# Altium PCB RobotCtrl_Base_Power.PcbDoc
Units mil, origin at the board's own origin, x right, y up, seen from the top; angles counter-clockwise.
Board outline 3937.01 x 3937.01 mil, 2 copper layers (Top Layer, Bottom Layer); 21 components, 7 nets, 71 pads, 91 vias.
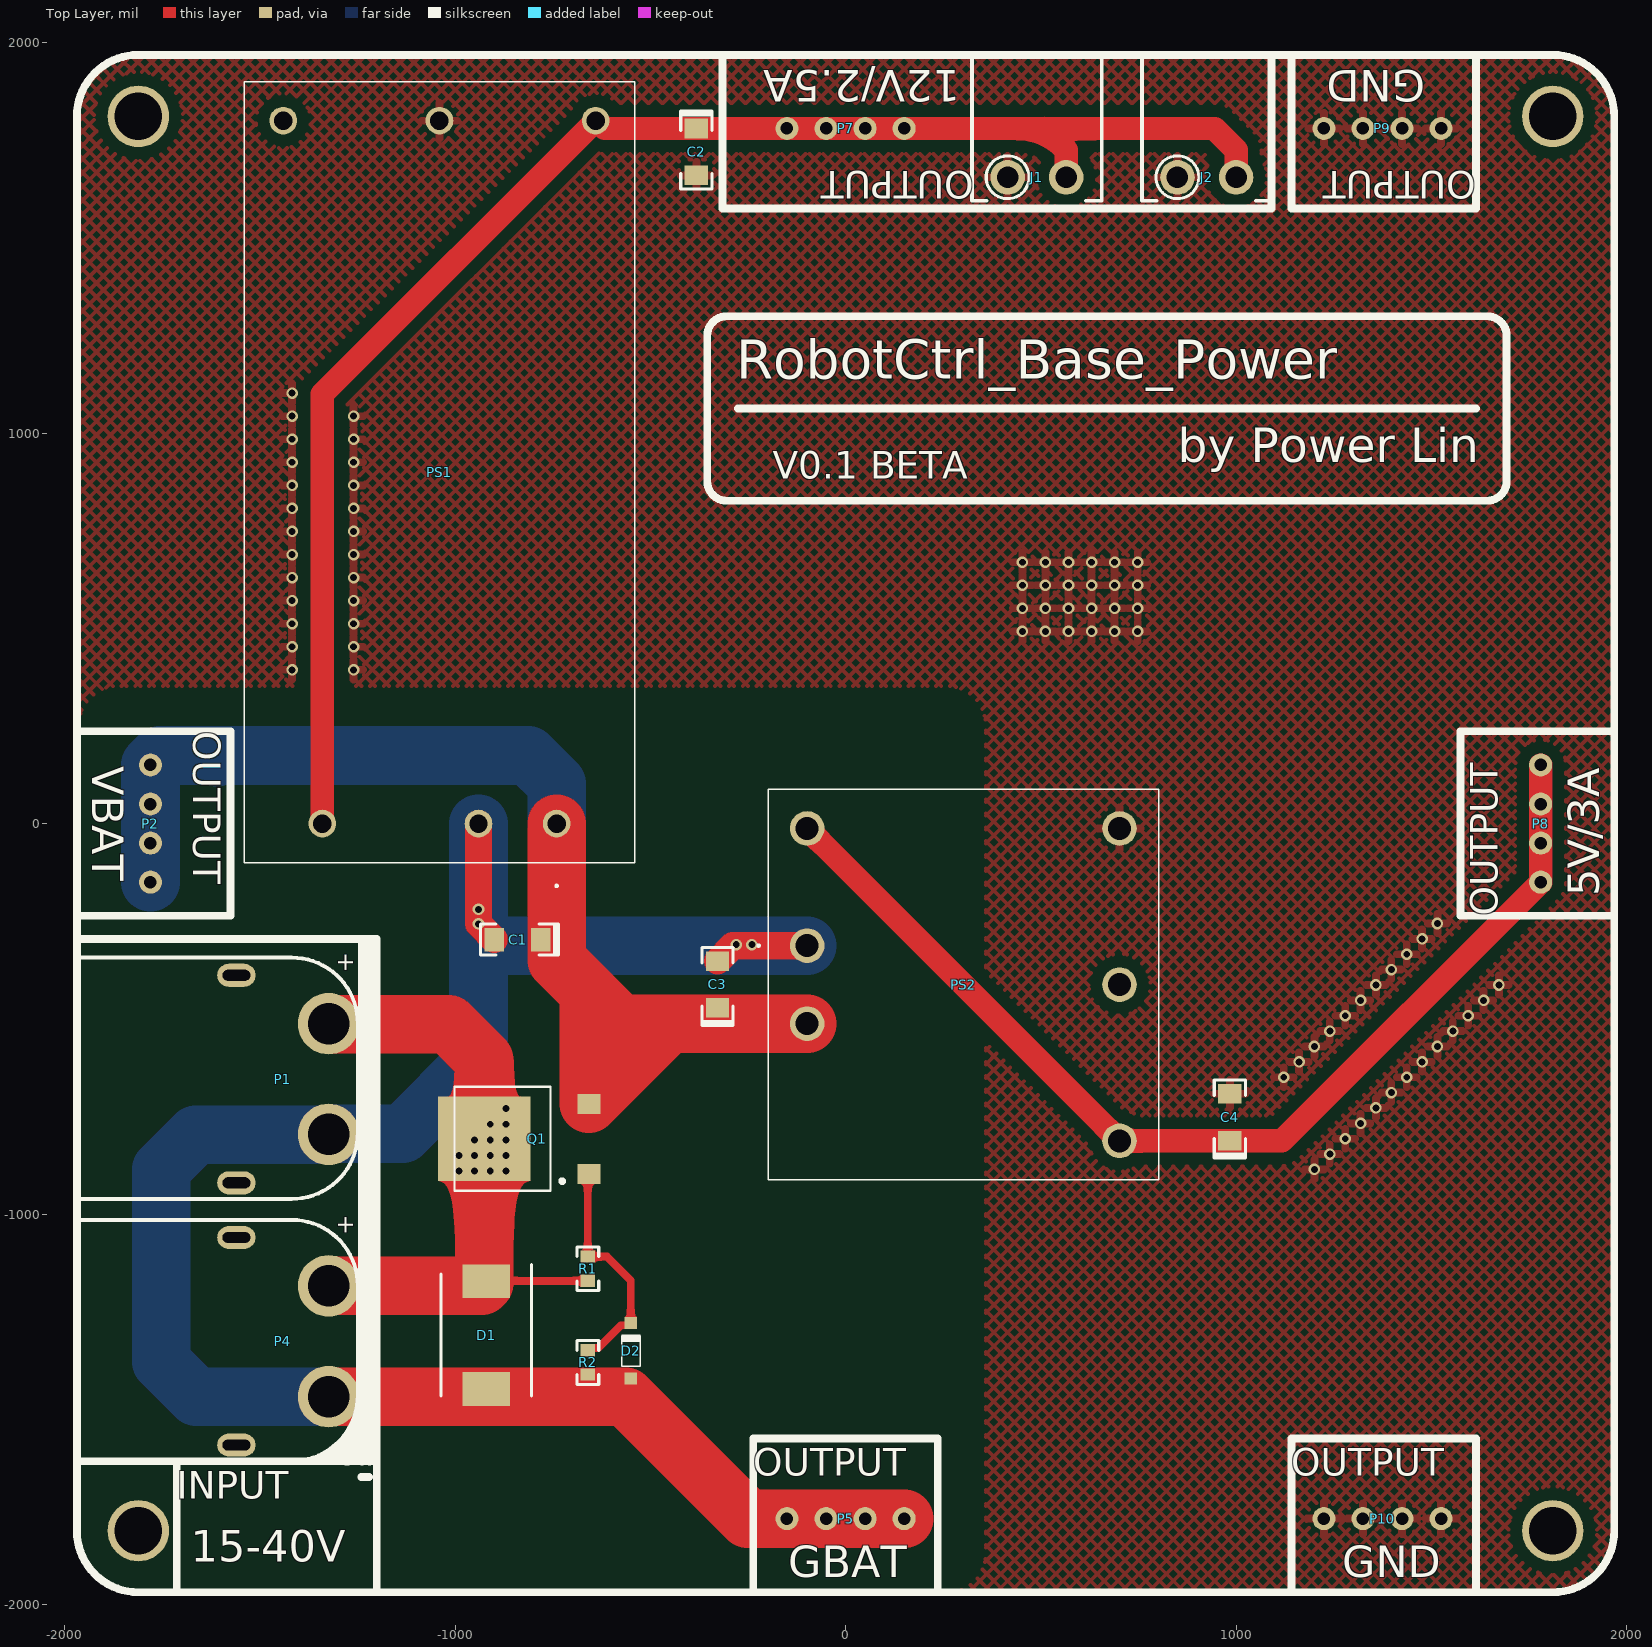
[diagram p0: Top Layer view]
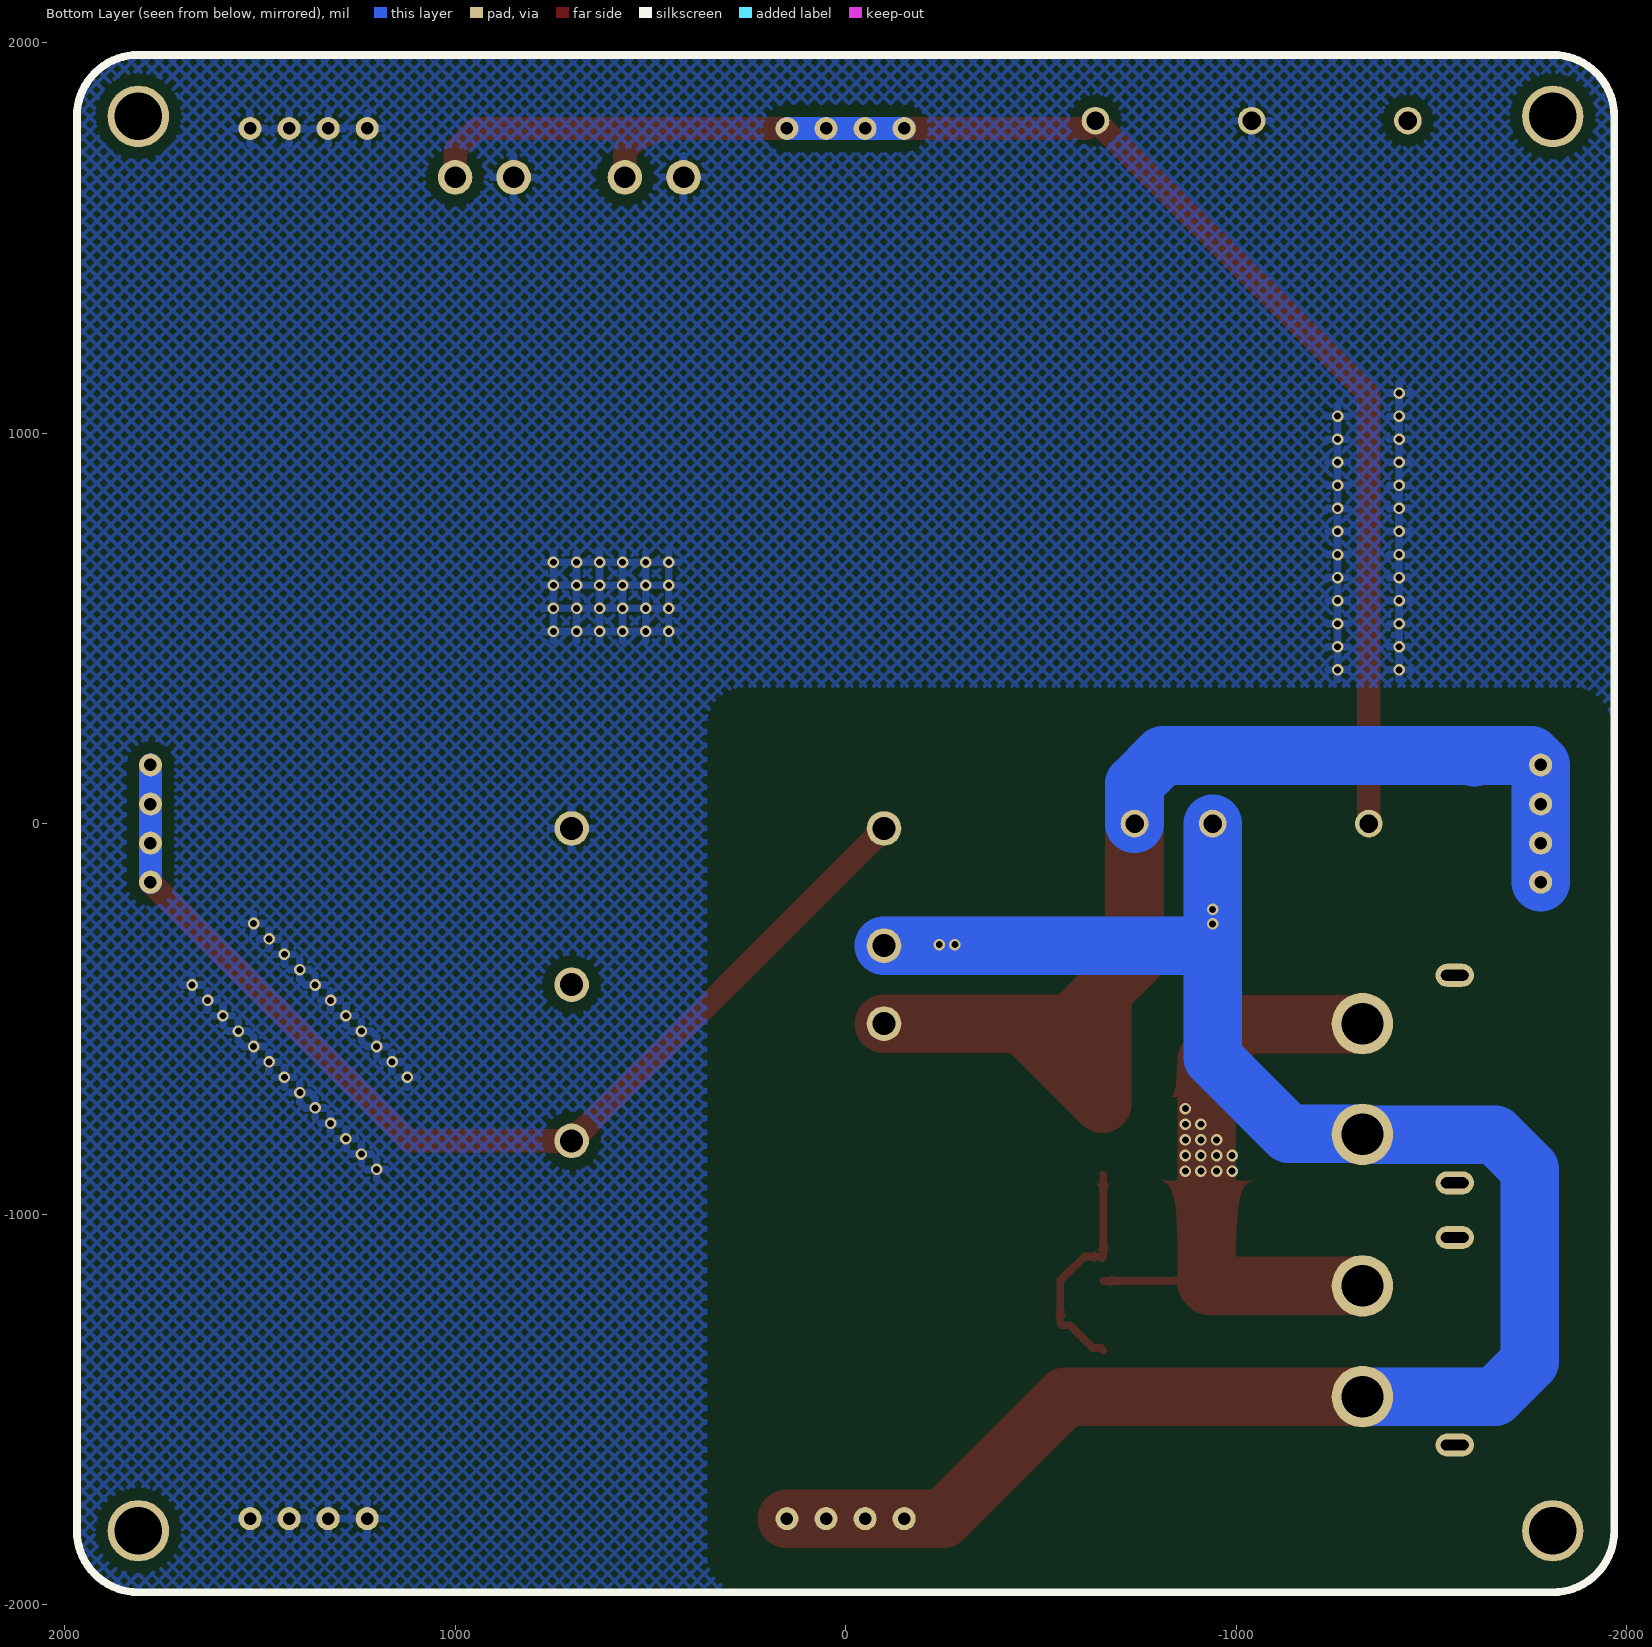
[diagram p1: Bottom Layer view, seen from below]
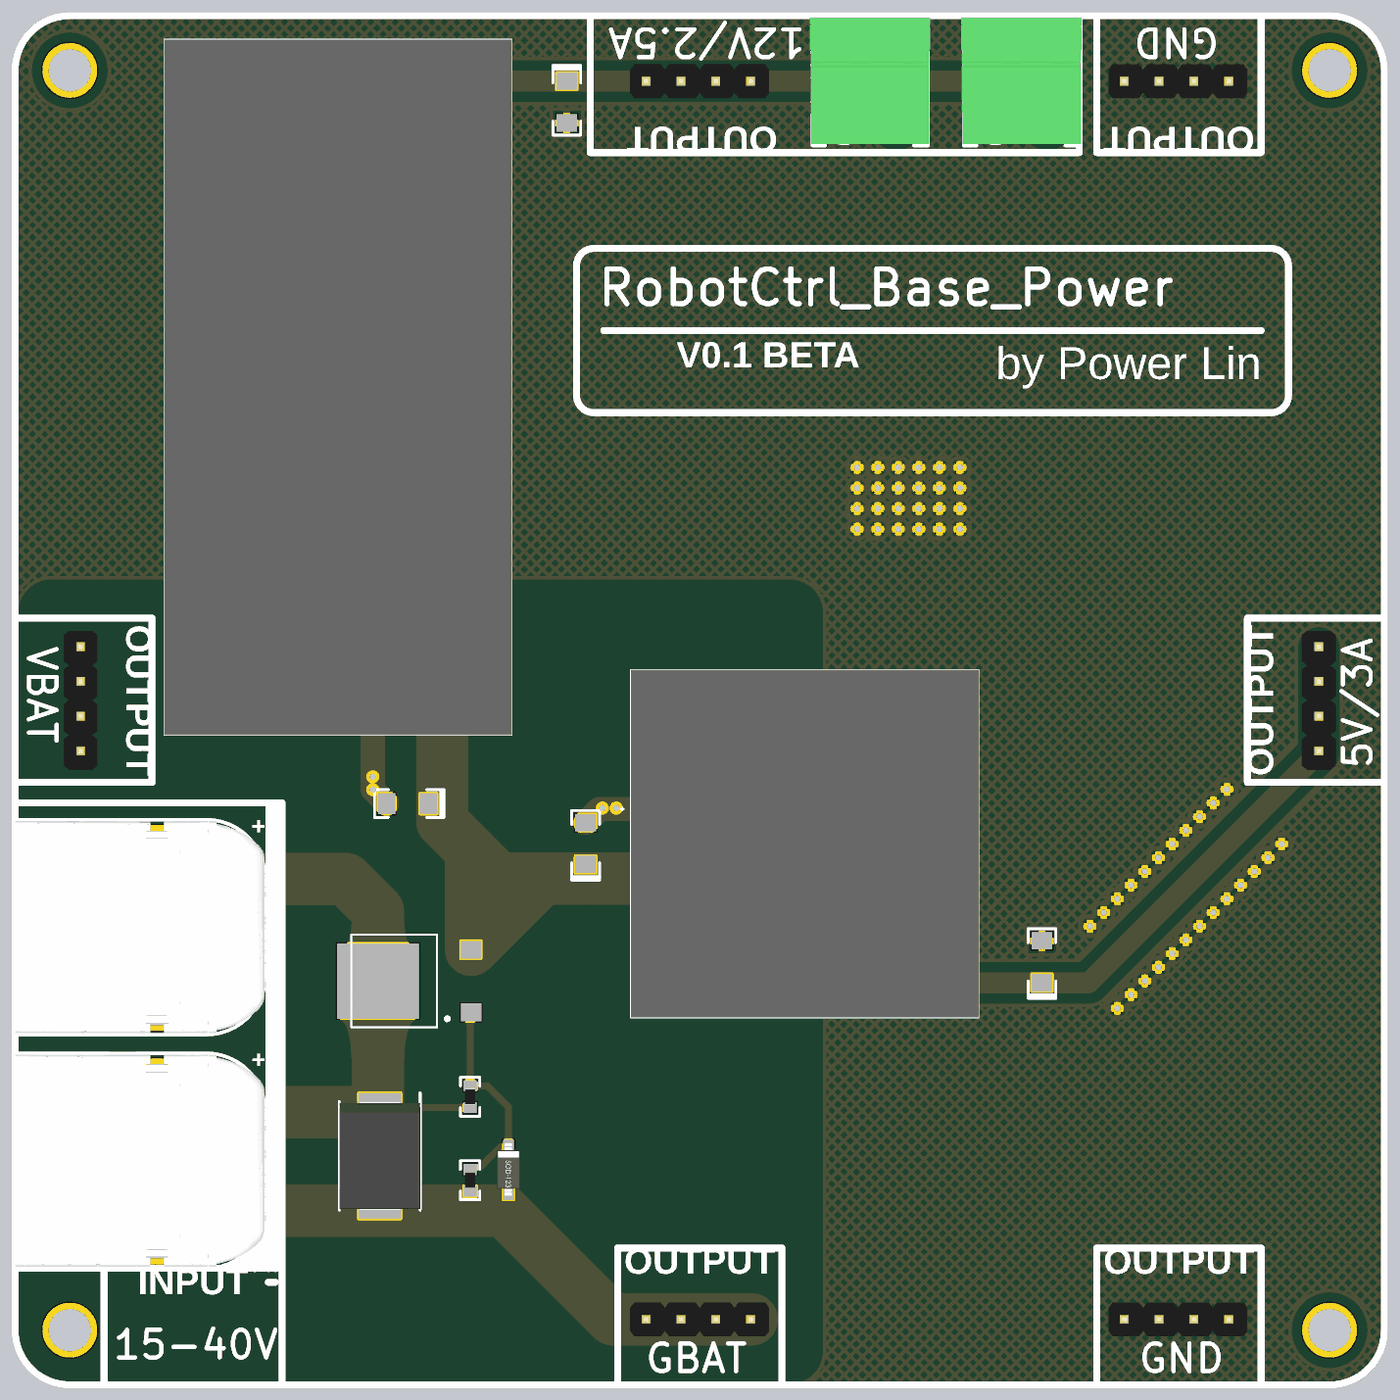
[diagram p2: 3D render of the assembled board from above, using the file's embedded part models]

## Layer stack, top to bottom
Top Solder: solder mask 0.4, Solder Resist, Dk 3.5
Top Layer: signal copper 1.4
Dielectric 1: dielectric 12.6, FR-4, Dk 4.8
Bottom Layer: signal copper 1.4
Bottom Solder: solder mask 0.4, Solder Resist, Dk 3.5

## Board outline
-1968.5,-1811.02 -1968.5,1811.02 cw(c-1811.02,1811.02) -1811.02,1968.5 1811.02,1968.5 cw(c1811.02,1811.02) 1968.5,1811.02 1968.5,-1811.02 cw(c1811.02,-1811.02) 1811.02,-1968.5 -1811.02,-1968.5 cw(c-1811.02,-1811.02)

## Design rules (kind name [scope] priority, off if disabled: settings)
Clearance [All] p1: gap=10 ignorepadtopadclearanceinfootprint=FALSE except(0: Arc-Hole Track-Hole SMDPad-Hole THPad-Hole Via-Hole Fill-Hole Poly-Hole Region-Hole Text-Hole; 30: Arc-Fill Arc-Poly Arc-Region Track-Fill Track-Poly Track-Region SMDPad-Fill SMDPad-Poly SMDPad-Region THPad-Fill THPad-Poly THPad-Region Via-Fill Via-Poly Via-Region Fill-Fill Fill-Poly Fill-Region Poly-Poly Poly-Region Region-Region)
PlaneConnect [All] p1: planeconnectstyle=Direct reliefexpansion=20 reliefentries=4 reliefconductorwidth=20 reliefairgap=10
PolygonConnect [All] p1: connectstyle=Relief reliefconductorwidth=20 reliefentries=4 polygonreliefangle="90 Angle" airgapwidth=10
RoutingVias [All] p1: holewidth=17.72 width=29.53 viastyle="Through Hole" minholewidth=17.72 minwidth=29.53 maxholewidth=17.72 maxwidth=29.53
SolderMaskExpansion [All] p1: expansion=4 istentingtop=FALSE
Width [All] p1: maxlimit=200 minlimit=10 preferedwidth=10
29 further rules are at their usual default settings.

## Components (designator, comment, footprint, x,y, rotation, side; value= is the part's Value field where it differs from the comment)
C1 "100nF" CAP-AUX-3216 -824,-289 r0 top
C2 "100nF" CAP-AUX-3216 -390,1736 r90 top
C3 "100nF" CAP-AUX-3216 -320,-428 r270 top
C4 "100nF" CAP-AUX-3216 992.13,-767.72 r270 top
D1 "TPSMCJ30CA" DO-214AB/SMC -920,-1310 r270 top
D2 "MMSZ5240B" SOD_123 -550,-1350 r270 top
J1 "KF2EDGR-3.81-2P" "FCI 06-381-2PIN" 490,1655 r0 top
J2 "KF2EDGR-3.81-2P" "FCI 06-381-2PIN" 925,1655 r0 top
P1 "XT60" XT60PW-M -1323.78,-795.98 r90 top
P2 "HDR1x4_2.54" HDR1x4_2.54_180 -1780,150 r0 top
P4 "XT60" XT60PW-M -1323.78,-1467.48 r90 top
P5 "HDR1x4_2.54" HDR1x4_2.54_180 -150,-1780 r90 top
P7 "HDR1x4_2.54" HDR1x4_2.54_180 -150,1780 r90 top
P8 "HDR1x4_2.54" HDR1x4_2.54_180 1780,150 r0 top
P9 "HDR1x4_2.54" HDR1x4_2.54_180 1225,1780 r90 top
P10 "HDR1x4_2.54" HDR1x4_2.54_180 1225,-1780 r90 top
PS1 "URB2412LD-30WR3" URB2412LD30WR3 -740,0 r90 top
PS2 "URB2405YMD-15WR3" URB2405YMD15WR3 -98.43,-312.52 r90 top
Q1 "NCE40P70K" TO-252 -657.48,-897.24 r180 top
R1 "10k" R-0603 -660,-1140 r90 top
R2 "20k" R-0603 -660,-1380 r270 top

## Footprints (in the part's own frame and the unit in brackets; to place one, negate y for a bottom-side part, rotate by r counter-clockwise, add the part's x,y. Pads: shape width x height; smd on the part's side, far side on the other; paste and mask are expansions set on the pad)
CAP-AUX-3216 [mil] "钽电容1206大小"
  rect 50x60 smd: 1(44,-8) 2(-76,-8)
  silkscreen extent -111,-48 89,32, body extent -82,-45 52,26, height 67
DO-214AB/SMC [mm]
  rect 2.2x3.1 smd: 1(3.5,0) 2(-3.5,0)
  silkscreen extent -4.6,-2.95 3.97,2.95, body extent -3.97,-2.95 3.97,2.95, height 2.5
"FCI 06-381-2PIN" [mm] "FCI Pluggable Terminal Block"
  round 2.25 hole 1.4: 1(-1.905,0) 2(1.905,0)
  silkscreen extent -4.22,-1.52 4.22,7.87, body extent -4.4,-1.4 4.4,7.8, height 7.6
HDR1x4_2.54_180 [mm]
  round 1.5 hole 0.813: 1(0,0) 2(0,-2.54) 3(0,-5.08) 4(0,-7.62)
  body extent -1.25,-8.89 1.25,1.27, height 8.2
R-0603 [mm]
  rect 0.8x0.96 smd: 1(-0.79,0) 2(0.79,0)
  silkscreen extent -1.42,-0.71 1.42,0.71, body extent -0.76,-0.38 0.76,0.38, height 0.41
SOD_123 [mm]
  rect 0.8x0.8 smd: 1(1.8,0) 2(-1.8,0)
  silkscreen extent -1.02,-0.6 1.02,0.6, body extent -1.95,-0.85 1.9,0.85, height 1.42
TO-252 [mm] "贴片MOS管"
  rect 1.5x1.3 smd: 1(0,0) 2(0,-4.56)
  rect 6x5.5 smd: 3(6.8,-2.29)
  silkscreen extent 1.61,-5.66 8.74,1.09, body extent -0.56,-5.65 9.54,1.08, height 2.37
URB2405YMD15WR3 [mm]
  round 2.25 hole 1.5: 1(7.62,0) 2(0,0) 3(-5.08,0) 4(-12.7,-20.32) 5(-2.54,-20.32) 6(7.62,-20.32)
  silkscreen extent -15.24,-22.86 10.16,3.2, body extent -15.24,-22.86 10.16,2.54, height 12.3
URB2412LD30WR3 [mm]
  round 1.8 hole 1.2: 1(0,15.24) 2(0,5.08) 3(0,0) 4(45.72,-2.54) 5(45.72,7.62) 6(45.72,17.78)
  silkscreen extent -4.1,-5.08 48.26,20.32, body extent -2.54,-5.08 48.26,20.32, height 16.9
XT60PW-M [mm]
  oval 1.5x2.5 hole 0.7 slot 1.8 at 90 deg: 0(-3.15,6) 0(10.35,6)
  round 4 hole 2.7: 1(7.2,0) 2(0,0)
  silkscreen extent -4.2,-1.9 11.5,16.3, body extent -4.3,-1.95 11.6,16.35, height 8.45

## Part data
C1 C2 C3 C4: library part CAP-POL, "KM101M050F115A", Package=3528, SuppliersPartNumber=C16133, ComponentLink1Description=供应商链接, ComponentLink1URL=http://www.szlcsc.com/product/details_16815.html, Supplier=LC
D1: library part TVS_C
D2: library part DIODE, "稳压 10V", Package=SMA(DO-214AC), SuppliersPartNumber=C22452, ComponentLink1Description=供应商链接, ComponentLink1URL=http://www.szlcsc.com/product/details_23178.html, Supplier=LC
J1 J2: "TERM BLOCK HDR 2POS 90DEG 3.81MM", Color=Green, Current - UL=10A, Manufacturer="Amphenol Anytek", Manufacturer Part Number=OQ0232510000G, Operating Temperature="-40°C ~ 115°C", Voltage - UL=300V, Component Type=接线端子, ComponentLink1Description=Datasheet, ComponentLink1URL=http://portal.fciconnect.com/Comergent//fci/drawing/oqxx32x100j0g.pdf, Contact Mating Finish=Tin, Header Orientation="90°, Right Angle", LastUpdated="2019-12-16 19:14:30.110", Lifecycle Status=0, Minimum Order=1, Mounting Type="Through Hole", Number of Levels=1, Number of Positions=2, Packaging=Bulk, Part Number=OQ0232510000G, Part Status=Active, Pitch="0.150\" (3.81mm)", Positions Per Level=2, Price=0.49, Series=06-381, Termination Style=Solder, Type="Header, Male Pins, Shrouded (4 Side)"
P1 P4: library part XT30/60
P2 P5 P7 P8 P9 P10: "Header"
PS1: "金升阳隔离电源", Manufacturer_Name=Mornsun, Manufacturer_Part_Number=URB2412LD-30WHR3, Datasheet Link=https://4donline.ihs.com/images/VipMasterIC/IC/MNSN/MNSN-S-A0002273855/MNSN-S-A0002273855-1.pdf?hkey=EF798316E3902B6ED9A73243A3159BB0, Height=16.8mm
PS2: "金升阳隔离电源", Manufacturer_Name=Mornsun, Manufacturer_Part_Number=URB2405YMD-10WR3, Datasheet Link=https://www.mornsun-power.com/html/pdf/URB2405YMD-10WR3.html, Height=12.2mm
Q1: library part P-MOS, Case/Package=SOT23-3, Manufacturer="NCE Power", Package Description="3-Pin Small Outline Transistor, Body 2.9 x 1.3 mm, Pitch 0.95 mm", Component Type=Transistors, Datasheet URL=http://www.ncepower.com/Upload/MOSFET/mos1/55vpmos/NCE3407Adatasheet-17275285683.pdf, Datasheet Version="Rev. 1.1, 07/2014", Mounting Technology=SM, Package Reference=SOT23-3, RoHS Compliant=Unknown
R1 R2: library part RES, "贴片电阻", Package=0805, SuppliersPartNumber=C17798, Supplier=LC

## Free pads (board coordinates)
  round 157.48 hole 122.05: 2(-1811.02,-1811.02) 2(-1811.02,1811.02) 2(1811.02,-1811.02) 2(1811.02,1811.02)

## Via types
v1: diameter 29.53, hole 17.72, Top Layer to Bottom Layer, 91 vias

## Nets (pads, with @x,y where several pads share a name; then routed paths per layer and width w, separated by ;. In a path a pad name is that pad's centre, name@x,y a point inside that pad or via, vN(x,y) a via of type N, cw(c..) or ccw(c..) an arc to the next point about the centre after c; other vN are vias at no path point)
GBAT: C1.2 C3.2 D1.1 D2.1 P1.2 P4.2 P5.1 P5.2 P5.3 P5.4 PS1.2 PS2.2 R2.2 | length 5725.8
  Top Layer w20: D1.1 -886.69,-1414.49 -861.75,-1414.49 -857.26,-1410 -720,-1410 ; R2.2@-665.75,-1416.85 R2.2 R2.2@-659.88,-1410.98 ; D2.1@-550.12,-1420.98 D2.1
  Top Layer w70: PS1.2 v1(-940,-220) v1(-940,-257) C1.2 ; C3.2 -288.52,-312.52 PS2.2
  Top Layer w150: P1.2@-1325.21,-797.42 P1.2 ; P4.2 -886.69,-1467.48 -720,-1467.48 -660,-1467.48 -562.52,-1467.48 -250,-1780 P5.1 P5.2 P5.3 P5.4
  Bottom Layer w150: P4.2 -1662.44,-1467.48 -1751.97,-1377.95 -1751.97,-885.28 -1664.1,-797.42 -1325.21,-797.42 P1.2 -1322.35,-794.55 -1134.55,-794.55 -940,-600 -940,-330 ; PS1.2 v1(-940,-220) v1(-940,-257) -940,-330 ; PS2.2 -922.52,-312.52 -940,-330
  other v1: -280,-310 -240,-310
GND: C2.2 C4.2 J1.1 J2.1 P9.1 P9.2 P9.3 P9.4 P10.1 P10.2 P10.3 P10.4 PS1.5 PS2.6
  other v1: 1200.79,-885.83 1240.16,-846.46 1279.53,-807.09 1318.9,-767.72 1358.27,-728.35 1397.64,-688.98 1122.05,-649.61 1437.01,-649.61 1161.42,-610.24 1476.38,-610.24 1200.79,-570.87 1515.75,-570.87 1240.16,-531.5 1555.12,-531.5 1279.53,-492.13 1594.49,-492.13 1318.9,-452.76 1633.86,-452.76 1358.27,-413.39 1673.23,-413.39 1397.64,-374.02 1437.01,-334.65 1476.38,-295.28 1515.75,-255.91 -1417.32,393.7 -1259.84,393.7 -1417.32,452.76 -1259.84,452.76 452.76,492.13 511.81,492.13 570.87,492.13 629.92,492.13 688.98,492.13 748.03,492.13 -1417.32,511.81 -1259.84,511.81 452.76,551.18 511.81,551.18 570.87,551.18 629.92,551.18 688.98,551.18 748.03,551.18 -1417.32,570.87 -1259.84,570.87 452.76,610.24 511.81,610.24 570.87,610.24 629.92,610.24 688.98,610.24 748.03,610.24 -1417.32,629.92 -1259.84,629.92 452.76,669.29 511.81,669.29 570.87,669.29 629.92,669.29 688.98,669.29 748.03,669.29 -1417.32,688.98 -1259.84,688.98 -1417.32,748.03 -1259.84,748.03 -1417.32,807.09 -1259.84,807.09 -1417.32,866.14 -1259.84,866.14 -1417.32,925.2 -1259.84,925.2 -1417.32,984.25 -1259.84,984.25 -1417.32,1043.31 -1259.84,1043.31 -1417.32,1102.36
NetD1_2: D1.2 P1.1 P4.1 Q1.3 R1.1 | length 1678.2
  Top Layer w20: D1.2@-925.2,-1177.4 D1.2 -918.9,-1171.1 R1.1
  Top Layer w150: P4.1 -931.81,-1184.02 -925.2,-1177.4 Q1.3 -925.2,-605.43 -1016.68,-513.95 -1322.35,-513.95 P1.1
  other v1: -990,-890 -950,-890 -910,-890 -870,-890 -990,-850 -950,-850 -910,-850 -870,-850 -950,-810 -910,-810 -870,-810 -910,-770 -870,-770 -870,-730
NetD2_2: D2.2 Q1.1 R1.2 R2.1 | length 601.8
  Top Layer w15: Q1.1@-660,-899.76 Q1.1
  Top Layer w20: R2.1 -654.25,-1343.15 -633.15,-1343.15 -574.88,-1284.88 -555.75,-1284.88 D2.2 -550,-1170 -611.1,-1108.9 R1.2 ; Q1.1@-660,-899.76 R1.2 ; R1.2@-655.91,-1112.98 R1.2
VBAT: C1.1 C3.1 P2.1 P2.2 P2.3 P2.4 PS1.3 PS2.3 Q1.2 | length 3122.6
  Top Layer w150: PS1.3 -740,-350 -657.48,-432.52 ; PS2.3 -452.28,-512.52 ; -657.48,-432.52 -577.48,-512.52 -452.28,-512.52 ; -657.48,-432.52 Q1.2 -452.28,-512.52
  Bottom Layer w150: P2.4 P2.3 P2.2 P2.1 -1755.65,174.35 -1605.65,174.35 ; -1610,170 -1605.65,174.35 ; PS1.3 -740,102.13 -812.22,174.35 -1605.65,174.35
VCC_5V: C4.1 P8.1 P8.2 P8.3 P8.4 PS2.1 PS2.4 | length 3084.2
  Top Layer w60: PS2.1 PS2.4 1117.48,-812.52 P8.4 P8.3 P8.2 P8.1
  Bottom Layer w60: P8.4 P8.3 P8.2 P8.1
VCC_12V: C2.1 J1.2 J2.2 P7.1 P7.2 P7.3 P7.4 PS1.1 PS1.4 | length 4278.8
  Top Layer w60: PS1.1 -1340,1100 PS1.4 -637.06,1800 -617.06,1780 C2.1 P7.1 P7.2 P7.3 P7.4 510,1780 ; J1.2 565,1725 510,1780 ; J2.2 1000,1725 945,1780 510,1780
  Bottom Layer w60: P7.1 P7.2 P7.3 P7.4
pads on no net: P1.0 P4.0 PS1.6 PS2.5

## Polygon pours and split planes (outlines as drawn)
GND on Top Layer "NONET_L01_P-001" (hatched 45Degree grid 25 track 10, remove dead copper, pour order 0): -1811.02,1968.5 ccw(c-1811.02,1811.02) -1968.5,1811.02 -1968.5,-1811.02 ccw(c-1811.02,-1811.02) -1811.02,-1968.5 1811.02,-1968.5 ccw(c1811.02,-1811.02) 1968.5,-1811.02 1968.5,1811.02 ccw(c1811.02,1811.02) 1811.02,1968.5
GND on Bottom Layer "NONET_L01_P-001" (hatched 45Degree grid 25 track 10, remove dead copper, pour order 2): -1811.02,1968.5 ccw(c-1811.02,1811.02) -1968.5,1811.02 -1968.5,-1811.02 ccw(c-1811.02,-1811.02) -1811.02,-1968.5 1811.02,-1968.5 ccw(c1811.02,-1811.02) 1968.5,-1811.02 1968.5,1811.02 ccw(c1811.02,1811.02) 1811.02,1968.5

## Other copper
Top Layer:
  pour cut-out: -1963.78,-1870.71 ccw(c-1863.78,-1870.71) -1863.78,-1970.71 259.06,-1970.71 ccw(c259.06,-1870.71) 359.06,-1870.71 359.06,252.13 ccw(c259.06,252.13) 259.06,352.13 -1863.78,352.13 ccw(c-1863.78,252.13) -1963.78,252.13
Bottom Layer:
  pour cut-out: 359.06,-1870.71 cw(c259.06,-1870.71) 259.06,-1970.71 -1863.78,-1970.71 cw(c-1863.78,-1870.71) -1963.78,-1870.71 -1963.78,252.13 cw(c-1863.78,252.13) -1863.78,352.13 259.06,352.13 cw(c259.06,252.13) 359.06,252.13

## Silkscreen, mask and mechanical layers (free items; w line width, h text height)
Top Overlay:
  lines w20: -1968.5,-275.59 -1968.5,-295.28 -1200.79,-295.28 -1200.79,-1968.5 ; -1968.5,-236.22 -1574.8,-236.22 -1574.8,236.22 -1968.5,236.22 ; -1692.91,-1968.5 -1712.6,-1968.5 -1712.6,-1632.83 -1965.51,-1632.83 -1200.79,-1632.83 ; -1348.43,-1624.02 -1300,-1624.02 ccw(c-1300,-1574.02) -1250,-1574.02 -1250,-1515.75 ; -1279.53,-1633.86 ccw(c-1279.53,-1594.49) -1240.16,-1594.49 -1240.16,-1456.69 ; -1279.53,-1574.8 cw(c-1299.21,-1574.8) -1299.21,-1594.49 ccw(c-1299.21,-1564.96) -1269.68,-1564.96 ; -1269.68,-1555.12 -1269.68,-1564.96 ; -1250,-1525.59 -1250,-1564.17 cw(c-1300,-1564.17) -1300,-1614.17 -1328.74,-1614.17 -1309.84,-1614.17 ccw(c-1309.84,-1564.17) -1259.84,-1564.17 -1259.84,-1545.28 -1259.84,-1555.12 cw(c-1309.06,-1555.12) -1309.06,-1604.33 ccw(c-1309.06,-1564.96) -1269.68,-1564.96 ; -1240.16,-1673.23 -1220.47,-1673.23 ; -1238,-1633.86 -1238,-295.28 ; -1219.47,-1633.86 -1219.47,-295.28 ; -314.96,1968.5 -314.96,1574.8 1091.08,1574.8 1091.08,1965 ; -275.59,1062.99 1614.17,1062.99 ; -236.22,-1968.5 -236.22,-1574.8 236.22,-1574.8 236.22,-1968.5 ; 1141.73,-1968.5 1141.73,-1574.8 1614.17,-1574.8 1614.17,-1968.5 ; 1141.73,1968.5 1141.73,1574.8 1614.17,1574.8 1614.17,1968.5 ; 1968.5,-236.22 1574.8,-236.22 1574.8,236.22 1968.5,236.22 ; -1968.5,-1811.02 ccw(c-1811.02,-1811.02) -1811.02,-1968.5 1811.02,-1968.5 ccw(c1811.02,-1811.02) 1968.5,-1811.02 1968.5,1811.02 ccw(c1811.02,1811.02) 1811.02,1968.5 -1811.02,1968.5 ccw(c-1811.02,1811.02) -1968.5,1811.02 -1968.5,-1811.02 ; -354.33,876.77 ccw(c-304.33,876.77) -304.33,826.77 1642.91,826.77 ccw(c1642.91,876.77) 1692.91,876.77 1692.91,1249.21 ccw(c1642.91,1249.21) 1642.91,1299.21 -304.33,1299.21 ccw(c-304.33,1249.21) -354.33,1249.21 -354.33,1181.1 -354.33,876.77
  text "12V/2.5A" at 293.24,1929.75 h80 r180
  text "GND" at 1484.58,1929.75 h80 r180
  text "OUTPUT" at 328,1692.91 h120 r180
  text "OUTPUT" at 1614.17,1692.91 h120 r180
  text "RobotCtrl_Base_Power" at -280.4,1139.45 h100
  text "by Power Lin" at 851.13,896.06 h150
  text "V0.1 BETA" at -187.01,859.56 h120
  text "OUTPUT" at -1692.91,236.22 h120 r270
  text "VBAT" at -1929.75,146.62 h80 r270
  text "5V/3A" at 1929.75,-186.61 h80 r90
  text "OUTPUT" at 1692.91,-236.22 h120 r90
  text "OUTPUT" at -236.22,-1692.91 h120
  text "OUTPUT" at 1141.73,-1692.91 h120
  text "INPUT" at -1712.6,-1751.97 h120
  text "15-40V" at -1676.62,-1890.38 h80
  text "GBAT" at -146.62,-1929.75 h80
  text "GND" at 1271.32,-1929.75 h80
Bottom Overlay:
  the board outline again, w20
Mechanical 1:
  the board outline again, w10

## Text inside footprints (layer, text, board x,y; h text height)
P1: Top Overlay "+" at -1245.04,-382.6 h78.74 r90
P4: Top Overlay "+" at -1245.04,-1054.09 h78.74 r90